# Altium PCB SmartToy_FirstPage Board_REV01 PCB.PcbDoc
Units mil, origin at the board's own origin, x right, y up, seen from the top; angles counter-clockwise.
Board outline 1574.8 x 826.77 mil, 2 copper layers (Top Layer, Bottom Layer), stack 38.627 mil thick; 29 components, 39 nets, 108 pads, 57 vias.
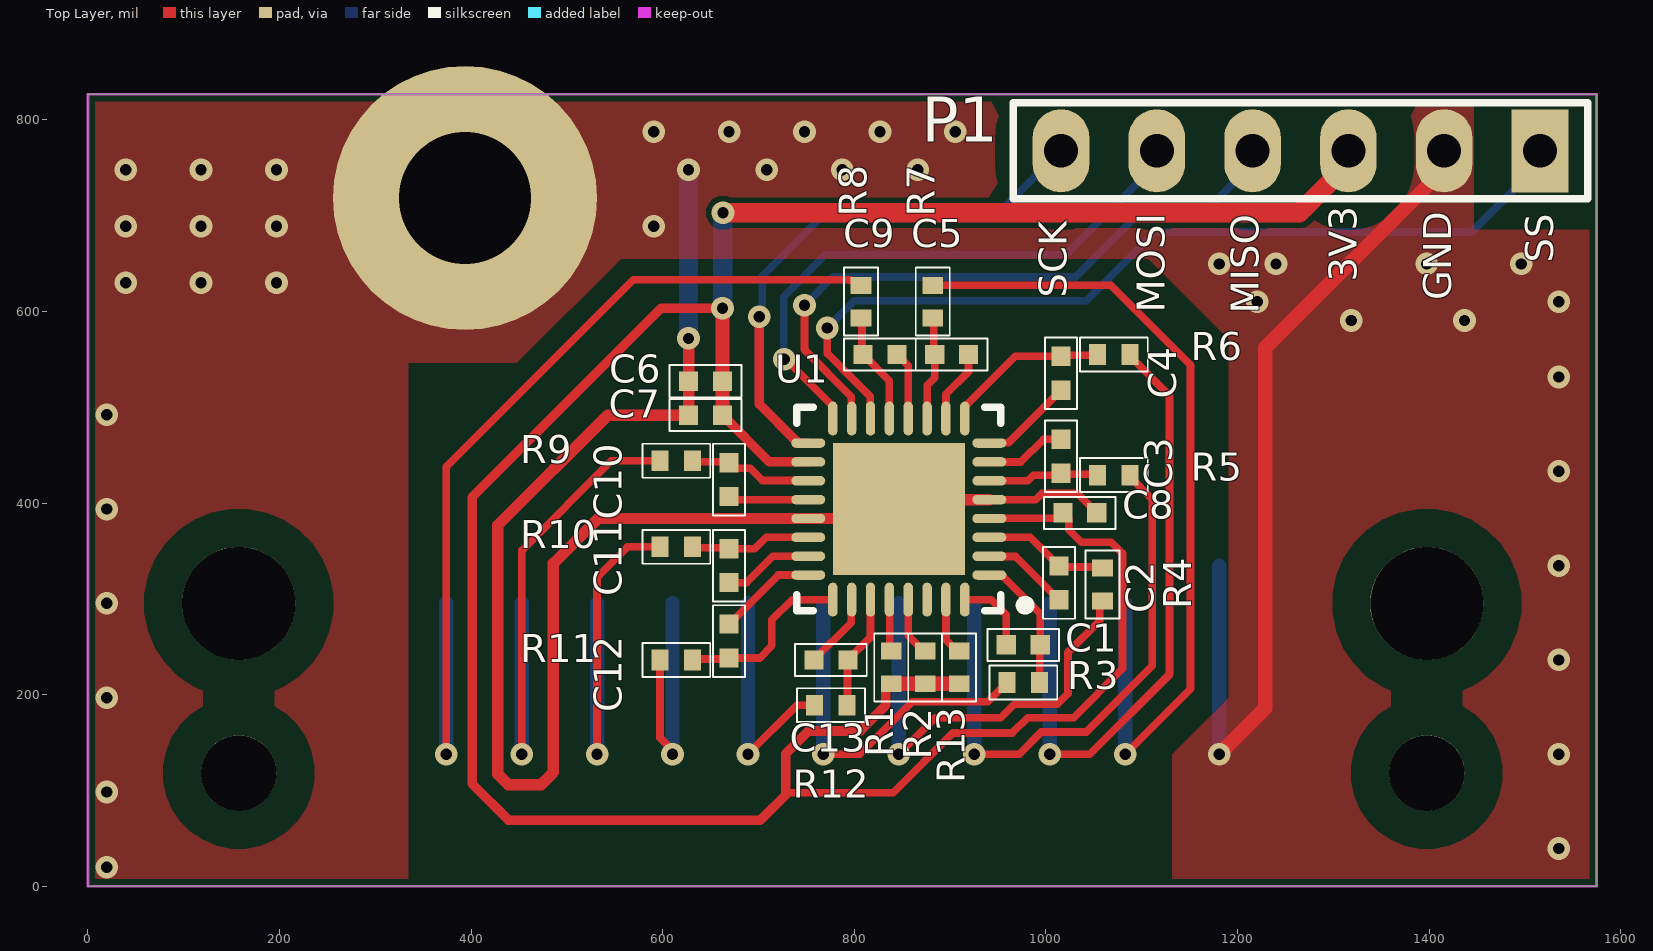
[diagram p0: Top Layer view]
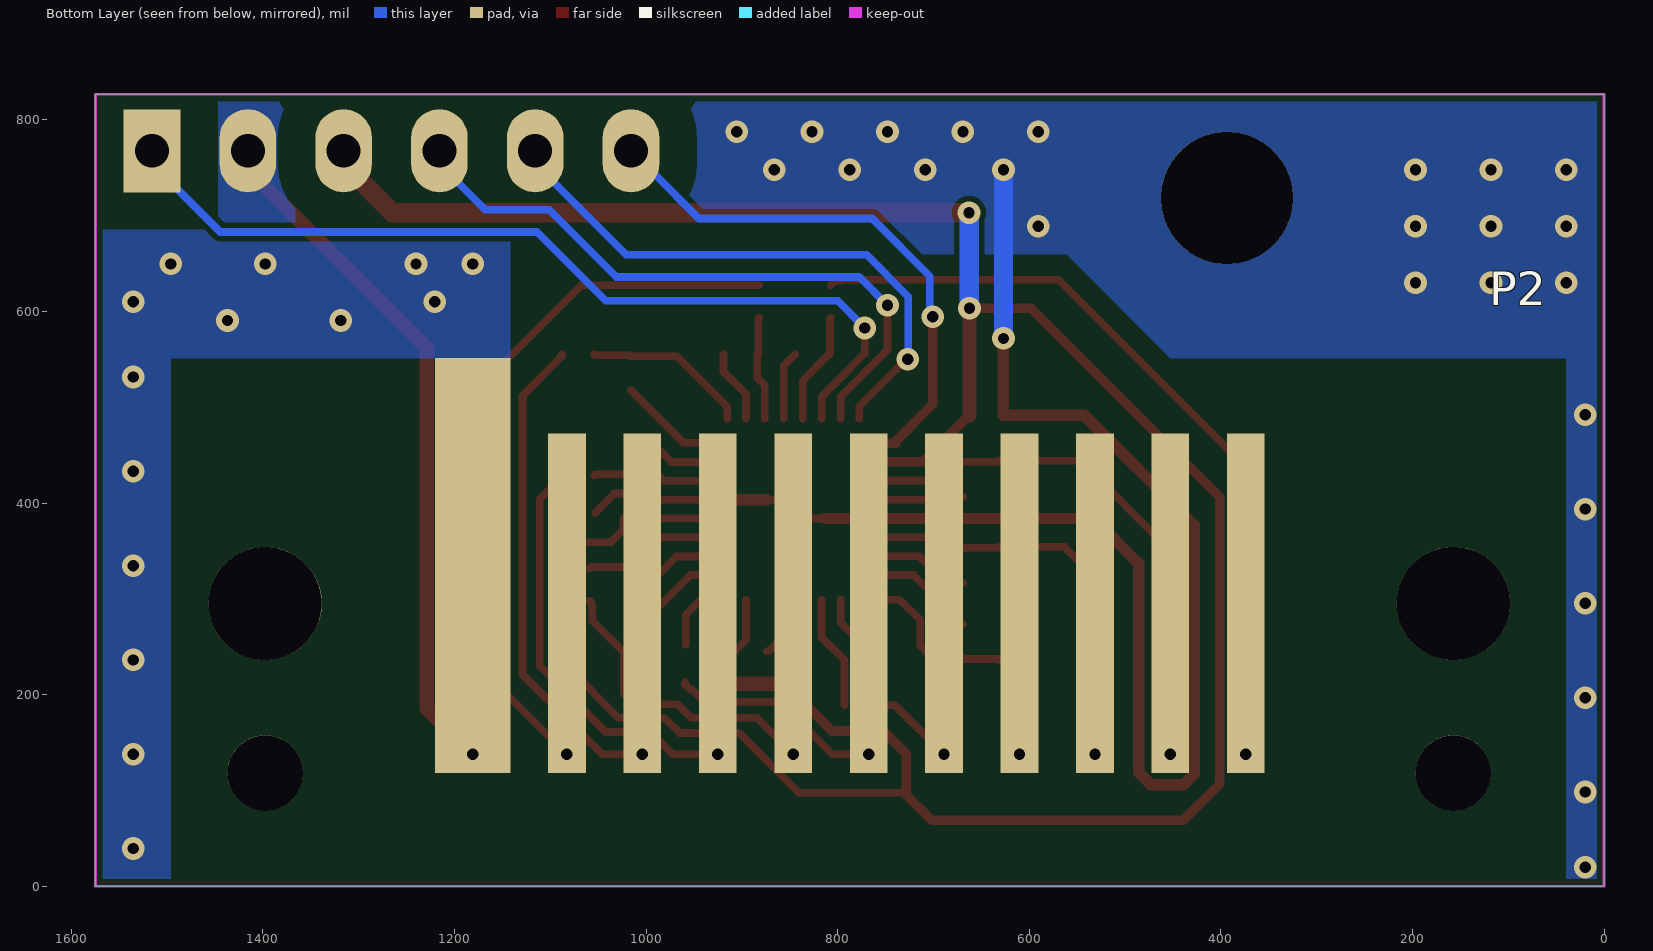
[diagram p1: Bottom Layer view, seen from below]
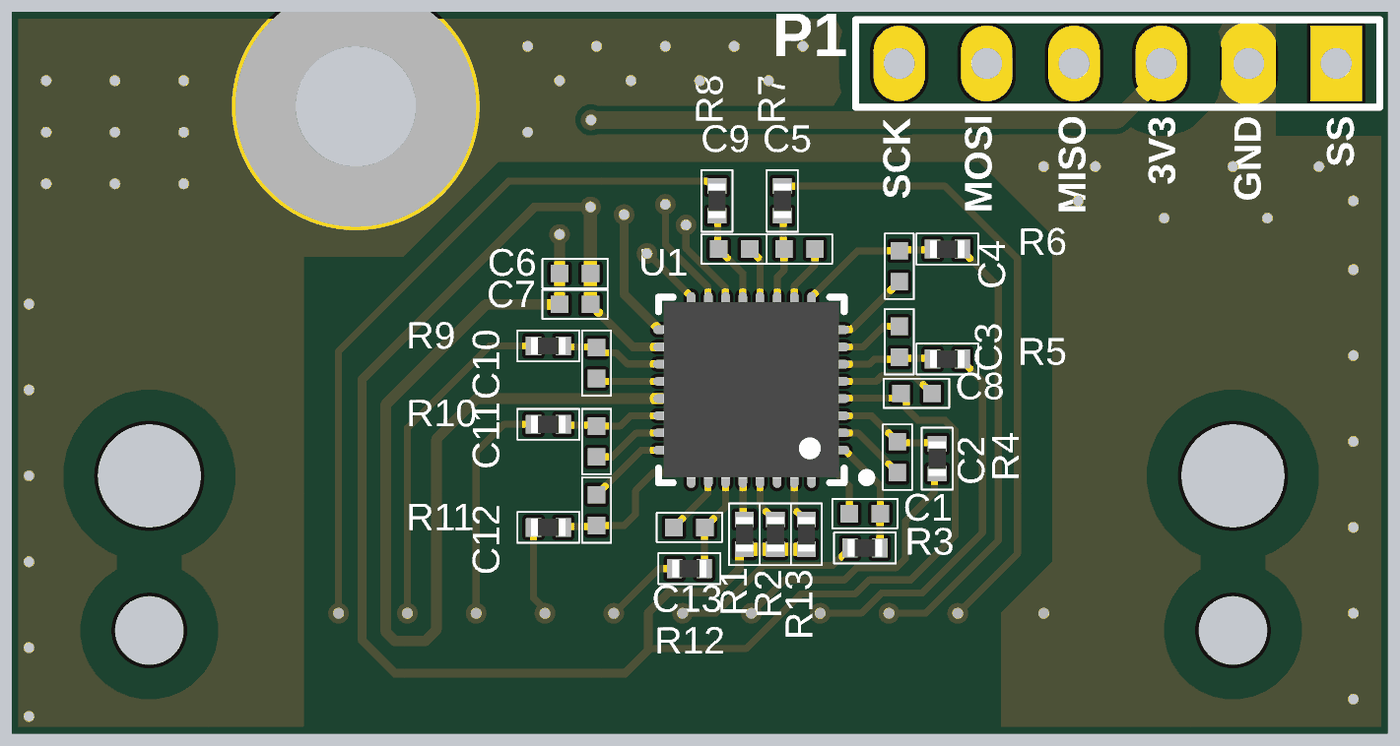
[diagram p2: 3D render of the assembled board from above, using the file's embedded part models]

## Layer stack, top to bottom
Top Solder: solder mask 0.4, Solder Resist, Dk 3.5
Top Layer: signal copper 1.4
Dielectric 1: dielectric 35.8268, FR-4, Dk 4.8
Bottom Layer: signal copper 1.4
Bottom Solder: solder mask 0.4, Solder Resist, Dk 3.5

## Board outline
0,0 0,826.77 1574.8,826.77 1574.8,0

## Design rules (kind name [scope] priority, off if disabled: settings)
Clearance [All] p1: gap=6 ignorepadtopadclearanceinfootprint=FALSE except(39.37: THPad-Fill THPad-Poly THPad-Region)
HoleSize [All] p1: absolutevalues=TRUE maxlimit=1000 minlimit=1 maxpercent=80.000 minpercent=20.000
HoleToHoleClearance [All] p1: gap=1 allowstackedmicrovias=TRUE
MinimumSolderMaskSliver [All] p1: minsoldermaskwidth=1
PolygonConnect [All] p1: connectstyle=Direct reliefconductorwidth=10 reliefentries=4 polygonreliefangle="90 Angle" airgapwidth=10
RoutingVias [All] p1: holewidth=11.81 width=23.62 viastyle="Through Hole" minholewidth=11.81 minwidth=23.62 maxholewidth=11.81 maxwidth=23.62
SilkToSilkClearance [All] p1: silktosilkclearance=1
SilkToSolderMaskClearance [IsPad] p1: minsilkscreentomaskgap=1 clearancetoexposedcopper=TRUE
SolderMaskExpansion [All] p1: expansion=4 istentingtop=FALSE
Width [All] p1: maxlimit=20 minlimit=8 preferedwidth=10
25 further rules are at their usual default settings.

## Components (designator, comment, footprint, x,y, rotation, side; value= is the part's Value field where it differs from the comment)
C1 "0.01uF" C0402M 976.38,251.97 r180 top
C2 "0.01uF" C0402M 1013.56,316.67 r270 top
C3 "0.01uF" C0402M 1015.75,448.82 r90 top
C4 "0.01uF" C0402M 1015.75,535.43 r270 top
C5 "0.01uF" C0402M 901.57,555.12 r0 top
C6 "4.7uF" C0402M 644.67,527.18 r180 top
C7 "0.1uF" C0402M 644.67,491.75 r180 top
C8 "0.1uF" C0402M 1035.43,389.76 r0 top
C9 "0.01uF" C0402M 826.77,555.12 r0 top
C10 "0.01uF" C0402M 669.29,424.45 r270 top
C11 "0.01uF" C0402M 669.29,334.65 r270 top
C12 "0.01uF" C0402M 669.29,255.91 r90 top
C13 "0.01uF" C0402M 775.59,236.22 r180 top
P1 "Header 6" HDR1X6 1515.75,767.72 r180 top locked
P2 "Header 11" TOUCH_CONTACT 767.72,295.28 r180 bottom locked
R1 "4.7k" R0402M 838.58,228.35 r90 top
R2 "4.7k" R0402M 874.02,228.35 r90 top
R3 "4.7k" R0402M 976.38,212.6 r0 top
R4 "4.7k" R0402M 1059.06,314.96 r90 top
R5 "4.7k" R0402M 1070.87,429.13 r180 top
R6 "4.7k" R0402M 1070.87,555.12 r180 top
R7 "4.7k" R0402M 881.89,610.24 r270 top
R8 "4.7k" R0402M 807.09,610.24 r270 top
R9 "4.7k" R0402M 614.17,444.13 r0 top
R10 "4.7k" R0402M 614.17,354.33 r0 top
R11 "4.7k" R0402M 614.17,236.22 r0 top
R12 "4.7k" R0402M 775.59,188.98 r0 top
R13 "100k" R0402M 909.45,228.35 r270 top
U1 "AT42QT1110-MUR" QFN50P500X500X100_HS-33N 846.46,393.7 r180 top

## Footprints (in the part's own frame and the unit in brackets; to place one, negate y for a bottom-side part, rotate by r counter-clockwise, add the part's x,y. Pads: shape width x height; smd on the part's side, far side on the other; paste and mask are expansions set on the pad)
C0402M [mm] "Capacitor 0402"
  rect 0.51x0.51 smd: 1(-0.45,0) 2(0.45,0)
  silkscreen extent -0.95,-0.43 0.95,0.43, body extent -0.53,-0.28 0.53,0.27, height 0.55
HDR1X6 [mm] "Connector; Header; 6 Position"
  rect 1.5x2.2 hole 0.9: 1(0,0)
  oval 1.5x2.2 hole 0.9: 2(2.54,0) 3(5.08,0) 4(7.62,0) 5(10.16,0) 6(12.7,0)
  silkscreen extent -1.27,-1.27 13.97,1.27
QFN50P500X500X100_HS-33N [mm] "QFN, 32-Leads, Body 5.00x5.00mm, Pitch 0.50mm, Thermal Pad 3.50x3.50mm, IPC Medium Density"
  oval 0.9x0.25 smd: 1(-2.4,1.75) 2(-2.4,1.25) 3(-2.4,0.75) 4(-2.4,0.25) 5(-2.4,-0.25) 6(-2.4,-0.75) 7(-2.4,-1.25) 8(-2.4,-1.75) 17(2.4,-1.75) 18(2.4,-1.25) 19(2.4,-0.75) 20(2.4,-0.25) 21(2.4,0.25) 22(2.4,0.75) 23(2.4,1.25) 24(2.4,1.75)
  oval 0.25x0.9 smd: 9(-1.75,-2.4) 10(-1.25,-2.4) 11(-0.75,-2.4) 12(-0.25,-2.4) 13(0.25,-2.4) 14(0.75,-2.4) 15(1.25,-2.4) 16(1.75,-2.4) 25(1.75,2.4) 26(1.25,2.4) 27(0.75,2.4) 28(0.25,2.4) 29(-0.25,2.4) 30(-0.75,2.4) 31(-1.25,2.4) 32(-1.75,2.4)
  rect 3.5x3.5 smd: 33(0,0)
  silkscreen extent -3.48,-2.7 2.7,2.7, body extent -2.56,-2.56 2.56,2.56, height 1
R0402M [mm] "Chip Resistor 0402"
  rect 0.45x0.55 smd: 1(-0.432,0) 2(0.432,0)
  silkscreen extent -0.9,-0.45 0.9,0.45, body extent -0.5,-0.25 0.5,0.25, height 0.4
TOUCH_CONTACT [mm]
  rect 2x11 smd: 1(-10.5,1)
  rect 1x9 smd: 2(-8,0) 3(-6,0) 4(-4,0) 5(-2,0) 6(0,0) 7(2,0) 8(4,0) 9(6,0) 10(8,0) 11(10,0)

## Part data
C1 C2 C3 C4 C5 C9 C10 C11 C12 C13: library part CAP_CER, "CAP CER 10000PF 25V X7R 0402", Capacitance=10nF, Case Code (Imperial)=0402, Case Code (Metric)=1005, Dielectric=X7R, Manufacturer=Samsung, Manufacturer Part Number=CL05B103KA5NNNC, Max Operating Temperature=125°C, Min Operating Temperature=-55°C, Package Quantity=1, Supplier Part Number 1=1276-1057-1-ND, Tolerance=10%, Voltage Rating=25V, Case/Package=0402, ComponentLink1Description=https://datasheet.ciiva.com/11586/upy-gphc-x7r-6-3v-to-50v-8-11586326.pdf?src-supplier=Avnet, ComponentLink1URL=https://datasheet.ciiva.com/11586/upy-gphc-x7r-6-3v-to-50v-8-11586326.pdf?src-supplier=Avnet, ComponentLink2Description=https://datasheet.ciiva.com/17434/upy-gphc-x7r-6-3v-to-50v-8-17434572.pdf?src-supplier=Avnet+Europe, ComponentLink2URL=https://datasheet.ciiva.com/17434/upy-gphc-x7r-6-3v-to-50v-8-17434572.pdf?src-supplier=Avnet+Europe, ComponentLink3Description=https://datasheet.ciiva.com/15195/getdatasheetpartid-358612-15195635.pdf?src-supplier=Verical, ComponentLink3URL=https://datasheet.ciiva.com/15195/getdatasheetpartid-358612-15195635.pdf?src-supplier=Verical, ComponentLink4Description=https://datasheet.ciiva.com/16740/cl05b104kq5nnnc-16740683.pdf?src-supplier=Future+Electronics, ComponentLink4URL=https://datasheet.ciiva.com/16740/cl05b104kq5nnnc-16740683.pdf?src-supplier=Future+Electronics, Contact Plating=Tin, Depth=0.5mm, Height=0.5mm, Length=1mm, Mount="Surface Mount", Packaging="Tape and Reel", Pricing 1="1 = 0.10000, 10 = 0.01800, 50 = 0.00960, 100 = 0.00780, 500 = 0.00558, 1000 = 0.00439, 2500 = 0.00399, 5000 = 0.00367 (USD)", Radiation Hardening=No, RoHS=Yes, Stock 1=2714388, Supplier 1=Digi-Key, Thickness=0.022inch, Width=0.02inch
C6: library part CAP_CER, "CAP CER 4.7UF 16V X5R 0402", Case Code (Imperial)=0402, Case Code (Metric)=1005, Manufacturer=Samsung, Manufacturer Part Number=CL05A475MO5NUNC, Max Operating Temperature=85°C, Min Operating Temperature=-55°C, Supplier Part Number 1=1276-6836-6-ND, Tolerance=20%, Voltage Rating=16V, Capacitance=4.7uF, Case/Package=0402, ComponentLink1Description=https://datasheet.ciiva.com/25786/cl05a475mp5nrnc-25786963.pdf?src-supplier=Digi-Key, ComponentLink1URL=https://datasheet.ciiva.com/25786/cl05a475mp5nrnc-25786963.pdf?src-supplier=Digi-Key, ComponentLink2Description=https://datasheet.ciiva.com/16437/cl05b104kq5nnnc-16437353.pdf?src-supplier=Future+Electronics, ComponentLink2URL=https://datasheet.ciiva.com/16437/cl05b104kq5nnnc-16437353.pdf?src-supplier=Future+Electronics, ComponentLink3Description=http://www.farnell.com/datasheets/2710653.pdf?src-supplier=Farnell, ComponentLink3URL=http://www.farnell.com/datasheets/2710653.pdf?src-supplier=Farnell, ComponentLink4Description=http://www.farnell.com/datasheets/2710653.pdf?src-supplier=Newark, ComponentLink4URL=http://www.farnell.com/datasheets/2710653.pdf?src-supplier=Newark, ComponentLink5Description=http://www.samsungsem.com/kr/support/product-search/mlcc/CL05A475MO5NUNC.jsp?src-supplier=Digi-Key, ComponentLink5URL=http://www.samsungsem.com/kr/support/product-search/mlcc/CL05A475MO5NUNC.jsp?src-supplier=Digi-Key, Length=0.039inch, Mount="Surface Mount", Packaging="Tape and Reel", Pricing 1="1 = 0.45000, 10 = 0.32100, 100 = 0.21130, 500 = 0.15656, 1000 = 0.13307, 2500 = 0.12524, 5000 = 0.11741 (USD)", RoHS=Yes, Stock 1=1677309, Supplier 1=Digi-Key, Thickness=0.022inch, Width=0.02inch
C7 C8: library part CAP_CER, "CAP CER 0.1UF 50V X7R 0402", Capacitance=100nF, Case Code (Imperial)=0402, Case Code (Metric)=1005, Dielectric=X7R, Dielectric Material=Ceramic, Manufacturer=Murata, Manufacturer Part Number=GRM155R71H104KE14D, Max Operating Temperature=125°C, Min Operating Temperature=-55°C, Package Quantity=10000, Supplier Part Number 1=490-10700-1-ND, Tolerance=10%, Voltage=50V, Case/Package=0402, ComponentLink1Description=https://datasheet.ciiva.com/25741/cl10b104kb8nnnl-25741341.pdf?src-supplier=Digi-Key, ComponentLink1URL=https://datasheet.ciiva.com/25741/cl10b104kb8nnnl-25741341.pdf?src-supplier=Digi-Key, ComponentLink2Description=https://datasheet.ciiva.com/26838/getdatasheetpartid-357523-26838415.pdf?src-supplier=Verical, ComponentLink2URL=https://datasheet.ciiva.com/26838/getdatasheetpartid-357523-26838415.pdf?src-supplier=Verical, ComponentLink3Description=http://www.farnell.com/datasheets/2079156.pdf?src-supplier=Farnell, ComponentLink3URL=http://www.farnell.com/datasheets/2079156.pdf?src-supplier=Farnell, ComponentLink4Description=http://www.mouser.com/ds/2/281/c02e-2905.pdf?src-supplier=Mouser, ComponentLink4URL=http://www.mouser.com/ds/2/281/c02e-2905.pdf?src-supplier=Mouser, ComponentLink5Description=http://components.arrow.com/part/dataview/0323_07030614?src-supplier=Arrow+Europe, ComponentLink5URL=http://components.arrow.com/part/dataview/0323_07030614?src-supplier=Arrow+Europe, ComponentLink6Description=https://search.murata.co.jp/Ceramy/image/img/A01X/G101/ENG/GRM155R71H104KE14-01.pdf?src-supplier=Digi-Key, ComponentLink6URL=https://search.murata.co.jp/Ceramy/image/img/A01X/G101/ENG/GRM155R71H104KE14-01.pdf?src-supplier=Digi-Key, ComponentLink7Description=http://psearch.en.murata.com/capacitor/product/GRM155R71H104KE14%23.pdf?src-supplier=Avnet, ComponentLink7URL=http://psearch.en.murata.com/capacitor/product/GRM155R71H104KE14%23.pdf?src-supplier=Avnet, ComponentLink8Description=http://www.farnell.com/datasheets/2079156.pdf?src-supplier=Element14, ComponentLink8URL=http://www.farnell.com/datasheets/2079156.pdf?src-supplier=Element14, ComponentLink9Description=http://www.farnell.com/datasheets/2079156.pdf?src-supplier=Newark, ComponentLink9URL=http://www.farnell.com/datasheets/2079156.pdf?src-supplier=Newark, Composition=Ceramic, Depth=0.5mm, Dissipation Factor=0.025%, Height=0.5mm, Lead Free="Lead Free", Length=1mm, Material=Ceramic, Mount="Surface Mount", Packaging="Tape and Reel", Pricing 1="1 = 0.10000, 10 = 0.04600, 100 = 0.02050, 500 = 0.01464, 1000 = 0.01150, 2500 = 0.01045, 5000 = 0.00961 (USD)", REACH SVHC="No SVHC", RoHS=Yes, Stock 1=2282266, Supplier 1=Digi-Key, Termination=SMD/SMT, Thickness=0.022inch, Voltage Rating=50V, Voltage Rating (DC)=50V, Weight=0.000212oz, Width=0.5mm
P1: "Header, 6-Pin", LatestRevisionDate=17-Jul-2002, LatestRevisionNote="Re-released for DXP Platform.", Publisher="Altium Limited"
P2: "Header, 11-Pin", LatestRevisionDate=17-Jul-2002, LatestRevisionNote="Re-released for DXP Platform.", Publisher="Altium Limited"
R1 R2 R3 R4 R5 R6 R7 R8 R9 R10 R11 R12: library part RES_SMD, "RES SMD 4.7K OHM 1% 1/16W 0402", Case Code (Imperial)=0402, Case Code (Metric)=1005, Manufacturer=Yageo, Manufacturer Part Number=RC0402FR-074K7L, Max Operating Temperature=155°C, Min Operating Temperature=-55°C, Power Rating=62.5mW, Resistance=4.7kR, Resistor Type="Thick Film", Supplier Part Number 1=311-4.7KLRCT-ND, Temperature Coefficient=100ppm/°C, Tolerance=1%, Voltage Rating=50V, Case/Package=0402, ComponentLink1Description=https://datasheet.ciiva.com/7850/1018594-7850022.pdf?src-supplier=Element14, ComponentLink1URL=https://datasheet.ciiva.com/7850/1018594-7850022.pdf?src-supplier=Element14, ComponentLink2Description=https://datasheet.ciiva.com/7850/1018594-7850023.pdf?src-supplier=Element14, ComponentLink2URL=https://datasheet.ciiva.com/7850/1018594-7850023.pdf?src-supplier=Element14, ComponentLink3Description=https://datasheet.ciiva.com/15215/getdatasheetpartid-328119-15215035.pdf?src-supplier=Verical, ComponentLink3URL=https://datasheet.ciiva.com/15215/getdatasheetpartid-328119-15215035.pdf?src-supplier=Verical, ComponentLink4Description=https://datasheet.ciiva.com/22661/1686128-22661342.pdf?src-supplier=Element14, ComponentLink4URL=https://datasheet.ciiva.com/22661/1686128-22661342.pdf?src-supplier=Element14, Depth=0.5mm, Height=0.32mm, Lead Free="Lead Free", Length=1mm, Military Standard=Not, Number of Pins=2, Packaging="Tape and Reel", Pricing 1="1 = 0.10000, 10 = 0.01400, 100 = 0.00580, 1000 = 0.00260, 2500 = 0.00226, 5000 = 0.00186 (USD)", REACH SVHC="No SVHC", RoHS=Yes, Stock 1=10584879, Supplier 1=Digi-Key, Termination=SMD/SMT, Voltage Rating (DC)=50V, Width=0.5mm
R13: library part RES_SMD, "RES SMD 100K OHM 1% 1/16W 0402", Case Code (Imperial)=0402, Case Code (Metric)=1005, Manufacturer=Yageo, Manufacturer Part Number=RC0402FR-07100KL, Max Operating Temperature=155°C, Max Power Dissipation=63mW, Min Operating Temperature=-55°C, Package Quantity=1, Resistance=100kR, Resistor Type="Thick Film", Supplier Part Number 1=311-100KJRCT-ND, Temperature Coefficient=100ppm/°C, Tolerance=1%, Voltage Rating=50V, Case/Package=0402, ComponentLink1Description=https://datasheet.ciiva.com/11808/0900766b80f96399-11808107.pdf?src-supplier=RSComponents, ComponentLink1URL=https://datasheet.ciiva.com/11808/0900766b80f96399-11808107.pdf?src-supplier=RSComponents, ComponentLink2Description=https://datasheet.ciiva.com/7983/443971-7983593.pdf?src-supplier=Element14, ComponentLink2URL=https://datasheet.ciiva.com/7983/443971-7983593.pdf?src-supplier=Element14, ComponentLink3Description=https://datasheet.ciiva.com/46440/1868787-46440889.pdf?src-supplier=Element14, ComponentLink3URL=https://datasheet.ciiva.com/46440/1868787-46440889.pdf?src-supplier=Element14, ComponentLink4Description=https://datasheet.ciiva.com/7746/1738695-7746234.pdf?src-supplier=Element14, ComponentLink4URL=https://datasheet.ciiva.com/7746/1738695-7746234.pdf?src-supplier=Element14, ComponentLink5Description=https://datasheet.ciiva.com/7746/1738695-7746235.pdf?src-supplier=Element14, ComponentLink5URL=https://datasheet.ciiva.com/7746/1738695-7746235.pdf?src-supplier=Element14, ComponentLink6Description=https://datasheet.ciiva.com/22747/443971-22747516.pdf?src-supplier=Element14, ComponentLink6URL=https://datasheet.ciiva.com/22747/443971-22747516.pdf?src-supplier=Element14, ComponentLink7Description=https://datasheet.ciiva.com/7850/1018594-7850133.pdf?src-supplier=Element14, ComponentLink7URL=https://datasheet.ciiva.com/7850/1018594-7850133.pdf?src-supplier=Element14, ComponentLink8Description=https://datasheet.ciiva.com/2491/pyu-r-int-thick-7-2491207.pdf?src-supplier=Digi-Key, ComponentLink8URL=https://datasheet.ciiva.com/2491/pyu-r-int-thick-7-2491207.pdf?src-supplier=Digi-Key, ComponentLink9Description=https://datasheet.ciiva.com/2491/pyu-r-int-thick-7-2491208.pdf?src-supplier=Digi-Key, ComponentLink9URL=https://datasheet.ciiva.com/2491/pyu-r-int-thick-7-2491208.pdf?src-supplier=Digi-Key, ComponentLink10Description=https://datasheet.ciiva.com/2491/pyu-r-int-thick-7-2491209.pdf?src-supplier=Digi-Key, ComponentLink10URL=https://datasheet.ciiva.com/2491/pyu-r-int-thick-7-2491209.pdf?src-supplier=Digi-Key, ComponentLink11Description=https://datasheet.ciiva.com/17052/pyu-rc0402-51-rohs-l-6-r-17052137.pdf?src-supplier=Future+Electronics, ComponentLink11URL=https://datasheet.ciiva.com/17052/pyu-rc0402-51-rohs-l-6-r-17052137.pdf?src-supplier=Future+Electronics, ComponentLink12Description=https://datasheet.ciiva.com/12668/pyu-rc0402-51-rohs-l-6-r-12668218.pdf?src-supplier=Mouser, ComponentLink12URL=https://datasheet.ciiva.com/12668/pyu-rc0402-51-rohs-l-6-r-12668218.pdf?src-supplier=Mouser, ComponentLink13Description=https://datasheet.ciiva.com/46394/1018594-46394941.pdf?src-supplier=Element14, ComponentLink13URL=https://datasheet.ciiva.com/46394/1018594-46394941.pdf?src-supplier=Element14, Depth=0.5mm, Features="Moisture Resistant", Height=0.016inch, Lead Free="Lead Free", Length=1mm, Military Standard=Not, Number of Terminations=2, Packaging="Tape and Reel", Power Rating=63mW, Pricing 1="1 = 0.10000, 10 = 0.01200, 100 = 0.00480, 1000 = 0.00215, 2500 = 0.00186, 5000 = 0.00154 (USD)", REACH SVHC=Unknown, RoHS=Yes, Stock 1=3850330, Supplier 1=Digi-Key, Termination=SMD/SMT, Width=0.02inch
U1: "Capacitive Touch Screen 11 Key 32-Pin VQFN EP T/R", Manufacturer 1=Microchip, Supplier Part Number 1=AT42QT1110-MURCT-ND, ComponentLink1Description=http://www.microchip.com/mymicrochip/filehandler.aspx?ddocname=en590256&src-supplier=Digi-Key, ComponentLink1URL=http://www.microchip.com/mymicrochip/filehandler.aspx?ddocname=en590256&src-supplier=Digi-Key, Manufacturer Part Number 1=AT42QT1110-MUR, Pricing 1="1=1.16000, 25=1.06000, 100=0.96200 (USD)", RoHS=No, Stock 1=4052, Supplier 1=Digi-Key

## Free pads (board coordinates)
  round 118.11 hole 118.11 unplated: H1(157.48,295.28) H3(1397.64,295.28)
  round 78.74 hole 78.74 unplated: H2(157.48,118.11) H4(1397.64,118.11)
  round 275.59 smd: H5(393.7,718.5)
  round 137.8 hole 137.8 unplated: H5(393.7,718.5)

## Via types
v1: diameter 23.62, hole 11.81, Top Layer to Bottom Layer, tented both sides, 57 vias

## Nets (pads, with @x,y where several pads share a name; then routed paths per layer and width w, separated by ;. In a path a pad name is that pad's centre, name@x,y a point inside that pad or via, vN(x,y) a via of type N, cw(c..) or ccw(c..) an arc to the next point about the centre after c; other vN are vias at no path point)
+3.3V: C6.1 C7.1 C8.1 P1.3 R1.1 R2.1 R13.2 U1.4 U1.18 | length 2961.5
  Top Layer w8: 728.5,97.5 840.5,97.5 903,160 965,160 981,176 1029,176 1079.88,226.88 1079.88,347.43 1068.31,359 1037,359 1023.76,372.24 1023.76,383.72 C8.1 1012.16,384.21 941.3,384.21 U1.4
  Top Layer w10: C7.1 711.22,442.91 U1.18 ; v1(662.39,603.33) 598.33,603.33 401,406 401,107 439,69 702,69 728.5,95.5 728.5,138.5 752,162 806,162 832.76,188.76 832.76,207.49 834,207.49 837.86,211.35 R1.1
  Top Layer w15: C7.1 C6.1 v1(662.39,603.33) ; R1.1 R2.1 R13.2
  Top Layer w20: v1(663,703) 1264.81,703 1315.75,753.94 P1.3
  Bottom Layer w20: v1(662.39,603.33) 662.69,603.64 662.69,702.69 v1(663,703)
GND: C6.2 C7.2 C8.2 P1.2 P2.1 pad.H5 U1.5 U1.21 U1.33 | length 2578.4
  Top Layer w8: U1.33@813,383.86 836.61,383.86 U1.33 856.3,403.54 U1.33@874,403.54 ; U1.5 989.54,403.54 996,410 1032.91,410 C8.2
  Top Layer w12: v1(626.95,571.83) C6.2 C7.2 542.75,491.75 428,377 428,117 439,106 473,106 486,119 486,337 532.86,383.86 U1.21 U1.33@813,383.86 ; U1.33@874,403.54 U1.5
  Top Layer w15: v1(1181.1,137.8) 1229,185.69 1229,562 1415.75,748.75 P1.2
  Bottom Layer w15: v1(1181.1,137.8) P2.1
  Bottom Layer w20: v1(626.95,571.83) v1@626.98,747.98
  other v1: 19.68,19.68 1535.43,39.37 19.68,98.43 1535.43,137.8 19.68,196.85 1535.43,236.22 19.68,295.28 1535.43,334.65 19.68,393.7 1535.43,433.07 19.68,492.13 1535.43,531.5 1318.9,590.55 1437.01,590.55 1220.47,610.24 1535.43,610.24 39.37,629.92 118.11,629.92 196.85,629.92 1181.1,649.61 1240.16,649.61 1397.64,649.61 1496.06,649.61 39.37,688.98 118.11,688.98 196.85,688.98 590.55,688.98 39.37,748.03 118.11,748.03 196.85,748.03 627,748 708.66,748.03 787.4,748.03 866.14,748.03 590.55,787.4 669.29,787.4 748.03,787.4 826.77,787.4 905.51,787.4
NetC1_1: C1.1 R3.2 U1.1 | length 142
  Top Layer w8: U1.1 953.74,324.8 994.09,284.45 C1.1 993.74,251.61 993.74,212.96 R3.2
NetC1_2: C1.2 U1.32 | length 81.3
  Top Layer w8: U1.32 942.79,299.21 958.66,283.34 C1.2
NetC2_1: C2.1 R4.2 U1.3 | length 131.5
  Top Layer w8: U1.3 983.77,364.17 C2.1 1014.77,333.17 1057.84,333.17 R4.2
NetC2_2: C2.2 U1.2 | length 91.5
  Top Layer w8: U1.2 941.3,344.14 968.38,344.14 C2.2
NetC3_1: C3.1 R5.2 U1.6 | length 117
  Top Layer w8: U1.6 981.23,423.23 986.92,428.91 1013.56,428.91 C3.1 1016.73,430.12 1052.88,430.12 R5.2
NetC3_2: C3.2 U1.7 | length 84.6
  Top Layer w8: U1.7 973.91,442.91 997.54,466.54 C3.2
NetC4_1: C4.1 R6.2 U1.9 | length 173.4
  Top Layer w8: U1.9 915.35,500.49 916.77,501.91 916.91,501.91 968.15,553.15 C4.1 1016.73,554.13 1052.88,554.13 R6.2
NetC4_2: C4.2 U1.8 | length 97.6
  Top Layer w8: U1.8 941.3,462.95 960.98,462.95 C4.2
NetC5_1: C5.1 R7.2 U1.11 | length 109.1
  Top Layer w8: U1.11 875.98,522.98 883.86,530.86 C5.1 882.87,556.1 882.87,592.25 R7.2
NetC5_2: C5.2 U1.10 | length 76.7
  Top Layer w8: U1.10 895.67,513.67 919.29,537.29 C5.2
NetC9_1: C9.1 R8.2 U1.13 | length 117.3
  Top Layer w8: R8.2 808.07,592.25 808.07,556.1 C9.1 836.61,527.56 U1.13
NetC9_2: C9.2 U1.12 | length 71.8
  Top Layer w8: C9.2 856.3,543.31 U1.12
NetC10_1: C10.1 R9.2 U1.19 | length 129.5
  Top Layer w8: R9.2 632.16,443.15 668.31,443.15 C10.1 675.21,436.25 691.33,436.25 704,423.58 751.62,423.58 U1.19
NetC10_2: C10.2 U1.20 | length 84
  Top Layer w8: C10.2 672.48,403.54 U1.20
NetC11_1: C11.1 R10.2 U1.22 | length 126.5
  Top Layer w8: R10.2 632.16,353.35 668.31,353.35 C11.1 696.19,352.36 708,364.17 U1.22
NetC11_2: C11.2 U1.23 | length 94.1
  Top Layer w8: C11.2 687.44,316.93 715,344.49 U1.23
NetC12_1: C12.1 R11.2 U1.25 | length 188.3
  Top Layer w8: R11.2 632.16,237.2 668.31,237.2 C12.1 701.19,238.19 714,251 714,278 735.21,299.21 U1.25
NetC12_2: C12.2 U1.24 | length 103.9
  Top Layer w8: C12.2 720.47,324.8 U1.24
NetC13_1: C13.1 R12.2 U1.27 | length 120.3
  Top Layer w8: R12.2 792.95,189.33 792.95,235.86 C13.1 816.93,259.84 U1.27
NetC13_2: C13.2 U1.26 | length 79.3
  Top Layer w8: C13.2 796.89,275.24 796.89,298.86 U1.26
NetR1_2: R1.2 U1.28 | length 54.7
  Top Layer w8: U1.28 836.97,298.86 836.97,246.96 R1.2
NetR2_2: R2.2 U1.29 | length 62.4
  Top Layer w8: U1.29 856.3,261.46 867.19,250.57 867.19,250.2 872.05,245.35 R2.2
NetR13_1: R13.1 U1.31 | length 60.7
  Top Layer w8: U1.31 895.67,257.16 907.48,245.35 R13.1
SPI3_MISO: P1.4 U1.15 | length 681.1
  Top Layer w8: v1(748.03,606.3) 748.03,559.97 796.89,511.11 796.89,488.54 U1.15
  Bottom Layer w8: v1(748.03,606.3) 777.73,636 1031,636 1101,706 1167.81,706 1215.75,753.94 P1.4
SPI3_MOSI: P1.5 U1.16 | length 611
  Top Layer w8: v1@727,551 v1(727,550) 728.54,550 777.56,500.98 U1.16
  Bottom Layer w8: v1(727,550) 726.22,550.78 726.22,615.33 769.89,659 1020.81,659 1115.75,753.94 P1.5
SPI3_SCK: P1.6 U1.17 | length 570.6
  Top Layer w10: v1(700.79,594.49) 700.79,503.32 739.25,464.85 739.25,462.68 739.33,462.6 U1.17
  Bottom Layer w8: v1(700.79,594.49) 703.78,597.48 703.78,636.85 763.93,697 945.03,697 992.58,744.55 993.09,744.55 1015.75,767.21 P1.6
TOUCH_CH0: P2.6 R3.1 | length 381.3
  Top Layer w8: v1(767.72,137.8) 805.8,137.8 860.49,192.49 939.27,192.49 952.55,205.77 954.52,205.77 959.38,210.63 R3.1
  Bottom Layer w15: v1(767.72,137.8) P2.6
TOUCH_CH1: P2.5 R4.1 | length 472.1
  Top Layer w8: v1(846.46,137.8) 884.66,176 953,176 967,190 1012,190 1023,201 1023,244 1056.1,277.1 1056.1,295.01 R4.1
  Bottom Layer w15: v1(846.46,137.8) P2.5
TOUCH_CH2: P2.4 R5.1 | length 590.2
  Top Layer w8: v1(925.2,137.8) 972,137.8 995.2,161 1042,161 1111,230 1111,404.03 1087.87,427.17 R5.1
  Bottom Layer w15: v1(925.2,137.8) P2.4
TOUCH_CH3: P2.3 R6.1 | length 668.2
  Top Layer w8: v1(1003.94,137.8) 1045.8,137.8 1129,221 1129,512.02 1087.87,553.15 R6.1
  Bottom Layer w15: v1(1003.94,137.8) P2.3
TOUCH_CH4: P2.2 R7.1 | length 895.6
  Top Layer w8: R7.1 1067.76,627.24 1151,544 1151,206.12 v1(1082.68,137.8)
  Bottom Layer w15: v1(1082.68,137.8) P2.2
TOUCH_CH5: P2.11 R8.1 | length 973.8
  Top Layer w8: v1(374.02,137.8) 374.02,437.84 569.17,633 795.57,633 796.48,632.09 802.23,632.09 R8.1
  Bottom Layer w15: v1(374.02,137.8) P2.11
TOUCH_CH6: P2.10 R9.1 | length 553.3
  Top Layer w8: v1(452.76,137.8) 452.76,350.39 546.5,444.13 R9.1
  Bottom Layer w15: v1(452.76,137.8) P2.10
TOUCH_CH7: P2.9 R10.1 | length 421
  Top Layer w8: v1(531.5,137.8) 531.5,322.5 563.33,354.33 R10.1
  Bottom Layer w15: v1(531.5,137.8) P2.9
TOUCH_CH8: P2.8 R11.1 | length 261.3
  Top Layer w8: R11.1 597.17,155.09 610.24,142.02 v1(610.24,137.8)
  Bottom Layer w15: v1(610.24,137.8) P2.8
TOUCH_CH9: P2.7 R12.1 | length 248.3
  Top Layer w8: v1(688.98,137.8) 740.16,188.98 R12.1
  Bottom Layer w15: v1(688.98,137.8) P2.7
TOUCH_SS2: P1.1 U1.14 | length 942.1
  Top Layer w8: v1(771.65,582.68) 771.65,556.15 801.44,526.35 816.58,511.22 816.58,488.54 U1.14
  Bottom Layer w8: v1(771.65,582.68) 799.98,611 1042,611 1114,683 1444.81,683 1490.22,728.41 1515.75,753.94 P1.1
pads on no net: U1.30

## Polygon pours and split planes (outlines as drawn)
GND on Bottom Layer "+5V_IN_L10_P-001" (solid, remove dead copper, pour order 0): 0,0 1574.8,0 1574.8,826.77 0,826.77
GND on Top Layer "+5V_IN_L10_P-001" (solid, remove dead copper, pour order 1): 0,0 0,826.77 1574.8,826.77 1574.8,0

## Keep-outs
Keep-Out Layer:
  the board outline again, w3

## Other copper
Top Layer:
  pour cut-out: 334.65,546.26 447.83,546.26 556.57,655 1106.81,655 1190.94,570.87 1190.94,196.85 1131.89,137.8 1131.89,0 334.65,0
Bottom Layer:
  pour cut-out: 1582.68,714.41 1582.68,732.28 1551.18,732.28 1551.18,714.41
  pour cut-out: 1366.14,818.9 1366.14,688.98 1358.27,688.98 1358.27,818.9
  pour cut-out: 1141.73,673.23 1116.14,673.23 1102.36,659.45 561.02,659.45 452.76,551.18 39.37,551.18 39.37,0 1496.06,0 1496.06,551.18 1141.73,551.18

## Silkscreen, mask and mechanical layers (free items; w line width, h text height)
Top Overlay:
  text "SS" at 1539.37,650.99 h50 r90
  text "3V3" at 1334.65,630.9 h50 r90
  text "SCK" at 1031.5,614.17 h50 r90
  text "GND" at 1433.07,611.91 h50 r90
  text "MOSI" at 1133.86,598.7 h50 r90
  text "MISO" at 1232.28,597.59 h50 r90
Mechanical 1:
  the board outline again, w6

## Dimensions
157.48,118.11 to 0,0 on Mechanical 1
1417.32,551.18 to 1417.32,0 on Mechanical 1
39.37,0 to 1496.06,0 on Mechanical 1
393.7,718.5 to 0,826.77 on Mechanical 1
393.7,718.5 to 0,826.77 on Mechanical 1
1397.64,118.11 to 1574.8,0 on Mechanical 1
157.48,118.11 to 0,0 on Mechanical 1
157.48,295.28 to 157.48,118.11 on Mechanical 1
1574.8,826.77 to 0,826.77 on Mechanical 1
1574.8,0 to 1574.8,826.77 on Mechanical 1